# EAGLE board TPA6132A2RTER (EAGLE 9.4.2)
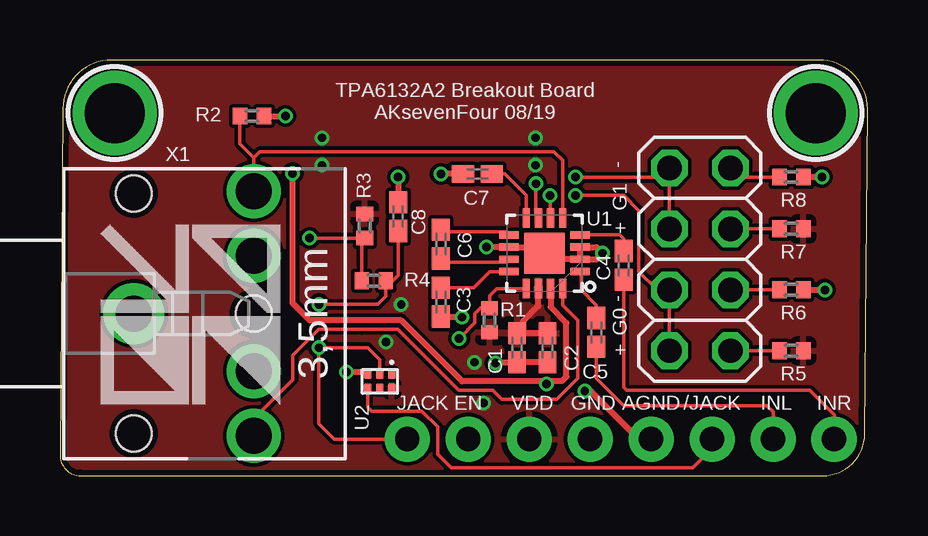
[diagram p0: board, top side]
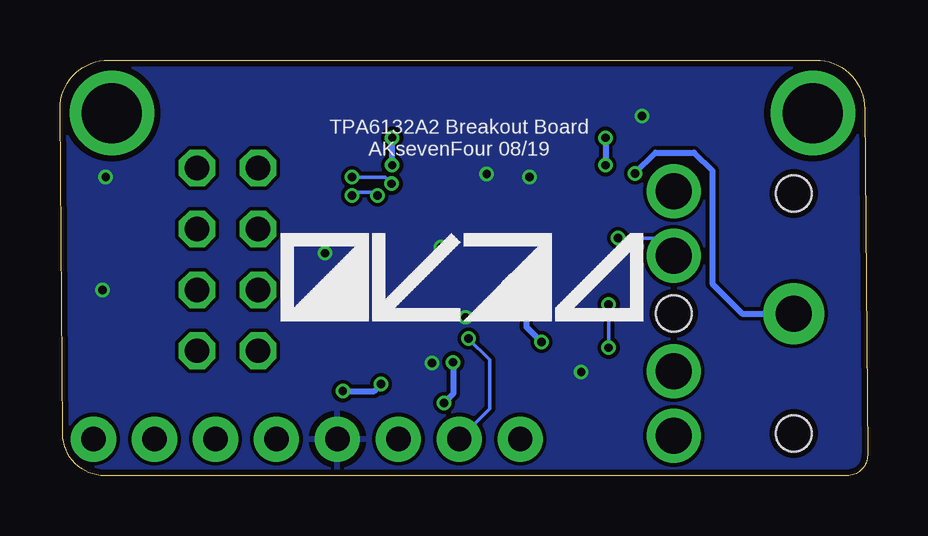
[diagram p1: board, bottom side, seen from below]

Size 33.65 x 17.32 mm. Coordinates in mm from the lower left corner, seen from the top.
Outline: 0.12,15.29 0,0.86 arc90 0.85,0 31.78,0 arc90 33.53,1.75 33.65,15.29 arc90 31.61,17.32 2.16,17.32 arc90 0.12,15.29
Copper layers (1*16): Top 0.07mm / dielectric 1.5mm / Bottom 0.07mm
Design rules "jlcpcb-2layer *": minimum track width 5mil, minimum drill 0.2mm, track to track 6mil, track to pad 6mil, pad to pad 6mil, via to via 6mil, smd to smd 6mil, copper to edge 10mil, drill to drill 5mil, minimum pad ring 10mil, minimum via ring 5mil, stop-mask expansion 2mil, vias tented up to drill 20mil, thermal gap 10mil
Net classes: 1 power1: width 0.254 mm

## Footprints (pad centres in the part's own frame; a part is rotated, then mirrored left to right if it is on the bottom)
C0402K = smd 0.925 x 0.74: 1 -0.6,0; 2 0.6,0
1X08_NO_SILK = drill 1.016 pad 1.88: 1 0,0; 2 2.54,0; 3 5.08,0; 4 7.62,0; 5 10.16,0; 6 12.7,0; 7 15.24,0; 8 17.78,0
2X04 = drill 1.016 octagon: 1 -3.81,-1.27; 2 -3.81,1.27; 3 -1.27,-1.27; 4 -1.27,1.27; 5 1.27,-1.27; 6 1.27,1.27; 7 3.81,-1.27; 8 3.81,1.27
MOUNTINGHOLE_2.5_PLATED = drill 2.5 pad 3.2: P$1 0,0
R0402 = smd 0.6 x 0.7: 1 -0.5,0; 2 0.5,0
QFN50P300X300X80-16N = smd 0.813 x 0.305: 1 -1.473,0.762; 2 -1.473,0.254; 3 -1.473,-0.254; 4 -1.473,-0.762; 9 1.473,-0.762; 10 1.473,-0.254; 11 1.473,0.254; 12 1.473,0.762 | smd 0.305 x 0.813: 5 -0.762,-1.473; 6 -0.254,-1.473; 7 0.254,-1.473; 8 0.762,-1.473; 13 0.762,1.473; 14 0.254,1.473; 15 -0.254,1.473; 16 -0.762,1.473 | smd 1.702 x 1.702: 17 0,0
MICROPAK-6 = smd 0.41 x 0.3: 1 -0.295,0.5; 2 -0.295,0; 3 -0.295,-0.5; 4 0.295,-0.5; 5 0.295,0; 6 0.295,0.5
STX3100 = drill 1.5 pad 2.54: 1 2.7,-0.1 | drill 1.5: 2 7.7,5; 3 7.7,2.3; 4 7.7,-2.5; 5 7.7,-5.2 | hole 1.5: 2.7,4.9; 2.7,-5.1; 7.7,-0.1

## Placement (x,y rotation side)
C1  2.2uF  [C0402K]  19.04,5.33 270 top
C2  10uF  [C0402K]  20.31,5.33 270 top
C3  2.2uF  [C0402K]  15.87,7.24 270 top
C4  1uF  [C0402K]  23.49,8.76 90 top
C5  1uF  [C0402K]  22.34,5.97 90 top
C6  1uF  [C0402K]  15.87,9.65 270 top
C7  1uF  [C0402K]  17.39,12.57 180 top
C8  0.1uF  [C0402K]  14.09,10.79 90 top
J1  [1X08_NO_SILK]  14.47,1.52 0 top
JP1  GAIN  [2X04]  26.66,9.02 90 top
MH1  MOUNTINGHOLE2.5  [MOUNTINGHOLE_2.5_PLATED]  2.28,15.11 0 top
MH2  MOUNTINGHOLE2.5  [MOUNTINGHOLE_2.5_PLATED]  31.49,15.11 0 top
R1  10K  [R0402]  17.9,6.48 270 top
R2  10K  [R0402]  7.99,14.99 180 top
R3  100K  [R0402]  12.69,10.41 90 top
R4  49.9K  [R0402]  13.07,8.13 180 top
R5  10K  [R0402]  30.47,5.21 180 top
R6  10K  [R0402]  30.47,7.75 180 top
R7  10K  [R0402]  30.47,10.29 180 top
R8  10K  [R0402]  30.47,12.45 180 top
U1  TPA6132A2RTER  [QFN50P300X300X80-16N]  20.19,9.27 180 top
U2  NC7SZ04L6X  [MICROPAK-6]  13.33,3.94 270 top
U$1  [AK74_LOGO_MEDIUM_TEXTONLY]  17.14,8.51 0 bottom
U$2  [AK74_LOGO_MEDIUM_TEXTONLY_SQUARE]  3.29,10.29 90 top
X1  STEREOJACKSTX3120-5B  [STX3100]  0.37,6.86 0 top

## Library data of the parts
C1-C8 = rcl; SPICEPREFIX: C
J1 = SparkFun-Connectors; PROD_ID: CONN-08438
JP1 = pinhead
MH1 MH2 = microbuilder
R1-R8 = rcl; SPICEPREFIX: R
U1 = TPA6132A2RTER; AVAILABILITY: Unavailable; DESCRIPTION: 25-mW DirectPath Stereo Headphone Amplifier with Pop Suppression _TPA6132_ 16-WQFN -40 to 85; MF: Texas Instruments; MP: TPA6132A2RTER; PACKAGE: WQFN-16 Texas Instruments; PRICE: None
U2 U$1 U$2 X1 = AK74

## Nets
/JACKSENSE: J1.6 U2.4
AGND: J1.5 U1.15 X1.1
ENABLE: J1.2 R1.1 U1.13
G0: JP1.2 JP1.4 U1.6
G1: JP1.6 JP1.8 U1.7
GND [power1]: C1.2 C2.2 C3.2 C7.2 C8.2 J1.4 R2.1 R6.1 R8.1 U1.2 U1.3 U1.10 U1.17 U2.3
INL-: C5.1 J1.7
INR-: C4.1 J1.8
JACKSENSE: C8.1 J1.1 R4.1 U2.2
N$1: C6.2 U1.11
N$2: C6.1 U1.9
N$3: JP1.3 R6.2
N$4: JP1.7 R8.2
N$5: C5.2 U1.1
N$7: C3.1 U1.12
N$9: C7.1 U1.8
N$24: JP1.1 R5.2
N$25: JP1.5 R7.2
N$27: R3.1 R4.2 X1.3
N$100: C4.2 U1.4
OUTL: U1.16 X1.5
OUTR: R2.2 U1.5 X1.2
VDD: C1.1 C2.1 J1.3 R1.2 R3.2 R5.1 R7.1 U1.14 U2.6

## Tracks (layer width: path | path; a pad name or v marks a point on that pad's centre or on a via)
/JACKSENSE
  Top 0.152: J1.6 27.17,1.14 26.36,0.33 16.3,0.33 15.74,0.89 15.74,2.03 15.08,2.69 12.98,2.69 12.83,2.85 U2.4
AGND  (via drill 0.35)
  Top 0.254: U1.15 20.44,7.04 21.1,6.37 21.1,4.13 20.91,3.94 20.4,3.94 v20.27,3.82 20.15,3.94 16.76,3.94 14.22,6.48 10.41,6.48 9.69,7.19 v9.69,12.6 | J1.5 24.12,1.52 22.12,3.53 v21.87,3.53
  Bottom 0.254: v21.87,3.53 20.56,3.53 v20.27,3.82 | v9.69,12.6 8.83,13.46 7.23,13.46 6.47,12.7 6.47,8 5.23,6.76 X1.1
ENABLE  (via drill 0.35)
  Top 0.152: U1.13 18.2,7.8 17.9,7.49 R1.1 17.52,6.98 17.29,6.75 17.29,6.37 v16.63,5.71
  Bottom 0.152: v16.63,5.71 15.74,4.83 15.74,2.79 J1.2
G0  (via drill 0.35)
  Top 0.152: U1.6 20.42,10.77 v20.42,11.68 | v21.48,11.68 23.49,11.68 24.12,11.05 24.12,8.51 24.88,7.75 JP1.4 JP1.2
  Bottom 0.152: v20.42,11.68 20.54,11.81 21.35,11.81 v21.48,11.68
G1  (via drill 0.35)
  Top 0.152: U1.7 19.83,10.85 v19.83,12.17 | v21.48,12.44 25.01,12.44 JP1.8 JP1.6
  Bottom 0.152: v19.83,12.17 20.1,12.44 v21.48,12.44
GND  (via drill 0.35)
  Top 0.254: U1.2 20.44,9.02 U1.17 19.93,9.53 U1.10 v17.77,9.53 | U1.2 U1.3 22.34,9.53 v22.6,9.27 22.34,9.02 U1.2 | C7.2 v15.87,12.57 | v14.09,12.45 C8.2 | R6.1 v31.87,7.75 | v31.74,12.45 R8.1 | v18.15,4.7 19.01,4.7 C1.2 C2.2 | v16.76,6.6 15.9,6.6 C3.2 | U2.3 12.74,4.32 v11.93,4.32 | R2.1 v9.39,14.99
  pour Bottom: -0.9,18.29 -0.9,-1.02 -0.77,-1.14 34.41,-1.14 34.79,-0.76 34.79,17.53 34.03,18.29
INL-
  Top 0.152: J1.7 29.71,2.67 29.46,2.92 23.49,2.92 22.34,4.06 C5.1
INR-
  Top 0.152: J1.8 32.25,2.54 31.23,3.56 23.61,3.56 23.49,3.68 C4.1
JACKSENSE  (via drill 0.35)
  Top 0.152: J1.1 11.42,1.52 10.79,2.16 v10.79,5.33 12.82,5.33 13.33,4.83 U2.2 | v10.79,7.14 13.23,7.14 13.57,7.48 R4.1 13.86,8.13 14.09,8.36 C8.1
  Bottom 0.152: v10.79,7.14 v10.79,5.33
N$1
  Top 0.152: U1.11 18.59,8.89 16.03,8.89 C6.2
N$2
  Top 0.152: C6.1 15.96,10.16 18.59,10.16 U1.9
N$3
  Top 0.152: JP1.3 R6.2
N$4
  Top 0.152: R8.2 28.31,12.45 JP1.7
N$5
  Top 0.152: U1.1 21.71,8.46 21.71,7.75 22.34,7.11 C5.2
N$7
  Top 0.152: U1.12 17.9,8.51 17.23,7.84 C3.1
N$9
  Top 0.152: U1.8 19.42,11.68 18.53,12.57 C7.1
N$24
  Top 0.152: R5.2 JP1.1
N$25
  Top 0.152: JP1.5 R7.2
N$27  (via drill 0.35)
  Top 0.152: R4.2 12.57,9.79 R3.1 v10.4,9.91
  Bottom 0.152: v10.4,9.91 8.82,9.91 X1.3
N$100
  Top 0.152: C4.2 23.49,9.87 23.33,10.03 U1.4
OUTL
  Top 0.152: U1.16 20.95,7.11 21.58,6.48 21.58,4.06 20.7,3.18 18.41,3.18 18.03,3.56 16.62,3.56 14.08,6.11 12.58,6.1 10.79,6.1 9.7,5.02 9.7,4 8.07,2.37 X1.5
OUTR
  Top 0.152: X1.2 8.07,13.25 | 8.07,13.25 8.33,13.51 20.58,13.51 20.95,13.14 U1.5 | R2.2 7.49,13.83 8.07,13.25
VDD  (via drill 0.35)
  Top 0.254: U1.14 19.93,7.08 19.3,6.44 19.3,5.97 | C1.1 19.04,6.22 19.3,5.97 | C2.1 19.33,5.93 19.3,5.97
  Bottom 0.254: v17.26,4.73 17.26,3.41 v17.65,3.03 | v10.91,14.08 v10.91,12.94 | v14.22,7.14 14.22,6.21 v13.58,5.57 | v19.8,12.94 v19.8,14.08
  pour Top: -1.66,18.92 -1.66,-1.65 35.43,-1.65 35.43,18.92

## Text on the board
tPlace: TPA6132A2 Breakout Board / AKsevenFour 08/19 | - | G1 | + | - | G0 | + | JACK | EN | VDD | GND | AGND | /JACK | INL | INR
bPlace: TPA6132A2 Breakout Board / AKsevenFour 08/19